# Altium PCB PCB1.PcbDoc
Units mm, origin at the board's own origin, x right, y up, seen from the top; angles counter-clockwise.
Board outline 50 x 51 mm, 2 copper layers (Top Layer, Bottom Layer); 25 components, 38 nets, 105 pads, 12 vias.
Unrouted connection lines stored in the file: 44.
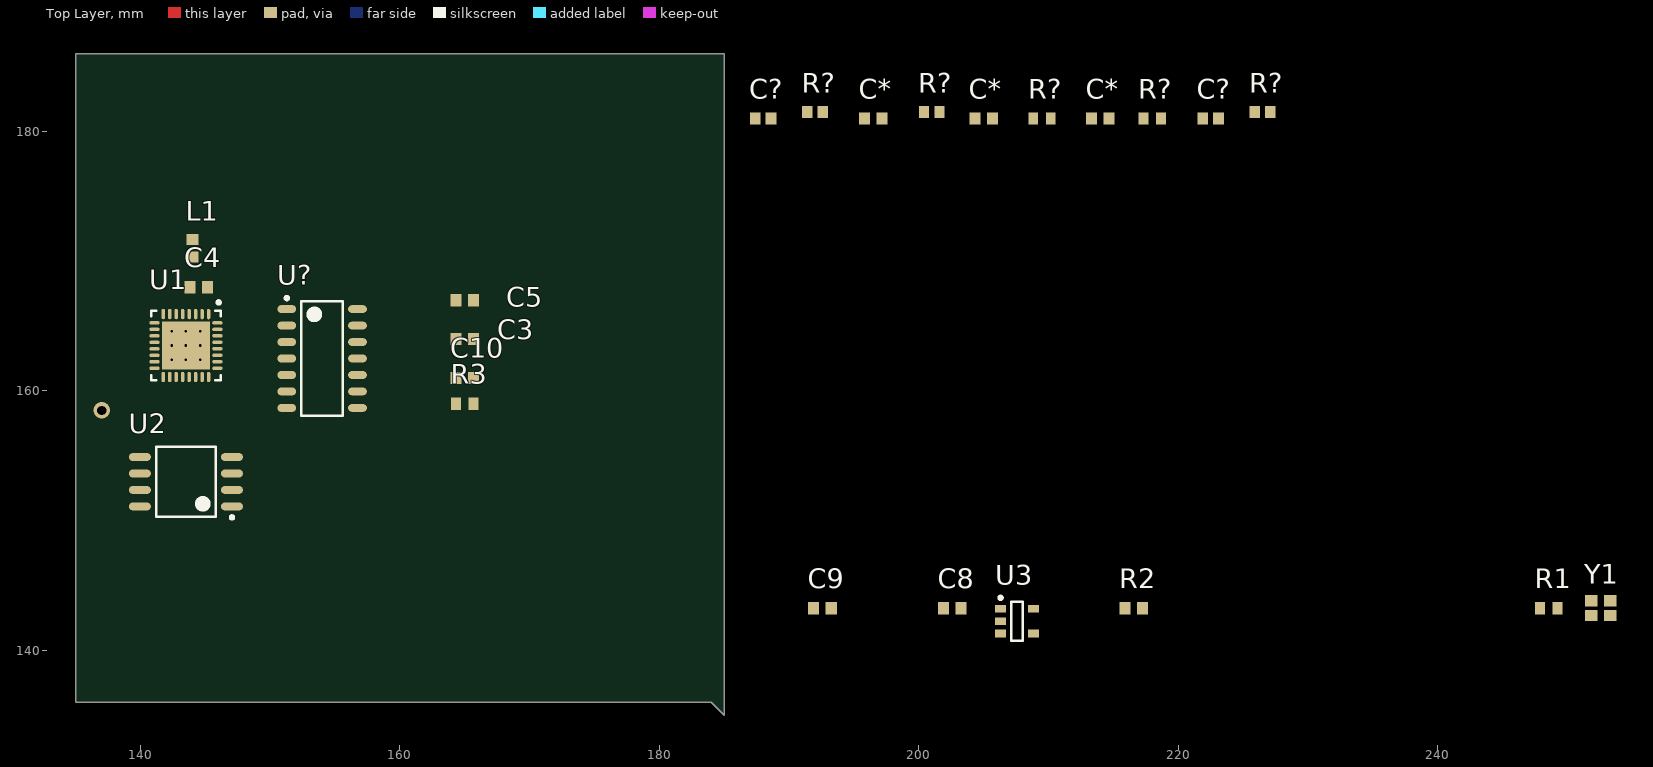
[diagram p0: Top Layer view]
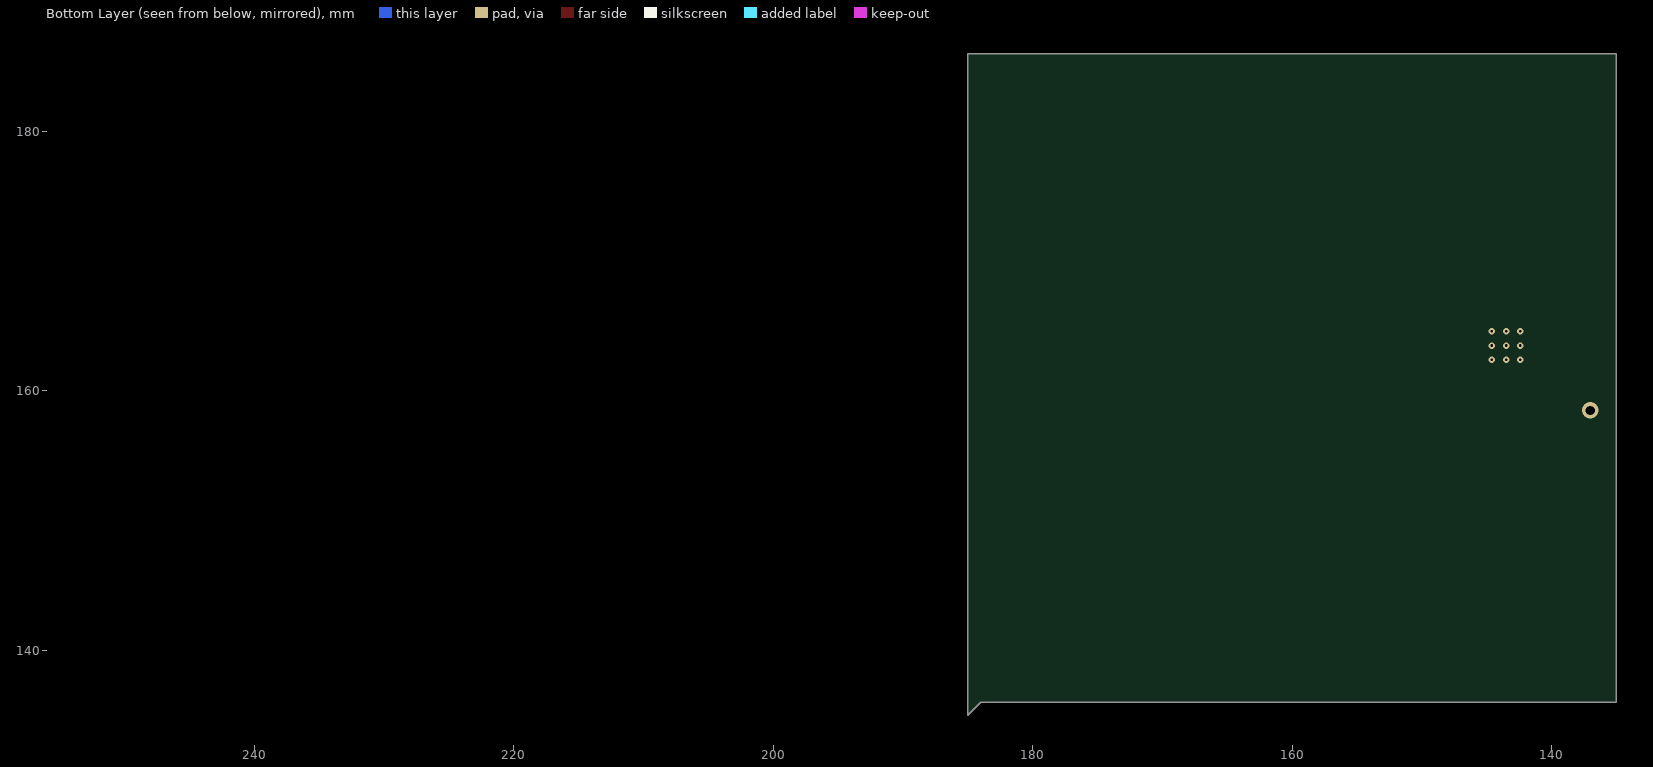
[diagram p1: Bottom Layer view, seen from below]

## Layer stack, top to bottom
Top Solder: solder mask 0.0102, Solder Resist, Dk 3.5
Top Layer: signal copper 0.0356
Dielectric 1: dielectric 0.32, FR-4, Dk 4.8
Bottom Layer: signal copper 0.0356
Bottom Solder: solder mask 0.0102, Solder Resist, Dk 3.5

## Board outline
135,136 135,186 185,186 185,135 184,136

## Design rules (kind name [scope] priority, off if disabled: settings)
Clearance [All] p1: gap=0.152 ignorepadtopadclearanceinfootprint=FALSE
PolygonConnect [All] p1: connectstyle=Relief reliefconductorwidth=0.254 reliefentries=4 polygonreliefangle="90 Angle" airgapwidth=0.254
RoomDefinition Sensor [InComponentClass('Sensor')] p1: confinementstyle=ConfineIn formatcopy=TRUE lockcomponents=FALSE outline 186.5,172 237.5,172 237.5,185 186.5,185
RoomDefinition MCU [InComponentClass('MCU')] p2: confinementstyle=ConfineIn formatcopy=TRUE lockcomponents=FALSE outline 186.575,135.25 254.575,135.25 254.575,148.25 186.575,148.25
RoutingTopology [All] p1: topology=Daisy_Simple
RoutingVias [All] p1: holewidth=0.3 width=0.635 viastyle="Through Hole" minholewidth=0.3 minwidth=0.457 maxholewidth=6.3 maxwidth=1.27
SolderMaskExpansion [All] p1: expansion=0
Width [All] p1: maxlimit=0.254 minlimit=0.152 preferedwidth=0.254
29 further rules are at their usual default settings.

## Classes and differential pairs
component class Sensor: C* C? Q? R? U?
component class MCU: C1 C2 C3 C4 C5 C6 C8 C9 C10 C? L1 R1 R2 R3 U1 U2 U3 VR1 Y1

## Components (designator, comment, footprint, x,y, rotation, side; value= is the part's Value field where it differs from the comment)
C3 "1UF" Chip2PinSM127P600-8N-SAMSUNG-0603 165,164 r0 top
C4 "10UF" Chip2PinSM127P600-8N-SAMSUNG-0603 144.5,168 r0 top
C5 "0.1UF" Chip2PinSM127P600-8N-SAMSUNG-0603 165,167 r180 top
C8 "1UF" Chip2PinSM127P600-8N-SAMSUNG-0603 202.575,143.25 r0 top
C9 "0.1UF" Chip2PinSM127P600-8N-SAMSUNG-0603 192.575,143.25 r0 top
C10 "10UF" Chip2PinSM127P600-8N-SAMSUNG-0603 165,161 r0 top
C* "0.1UF" Chip2PinSM127P600-8N-SAMSUNG-0603 196.5,181 r0 top
C* "0.1UF" Chip2PinSM127P600-8N-SAMSUNG-0603 214,181 r0 top
C* "0.1UF" Chip2PinSM127P600-8N-SAMSUNG-0603 205,181 r0 top
C? "33UF" Chip2PinSM127P600-8N-TDK_0603 222.5,181 r0 top
C? "33UF" Chip2PinSM127P600-8N-TDK_0603 188,181 r0 top
L1 "2.2NH" Chip2PinSM127P600-8N-SAMSUNG-0603 144,171 r90 top
R1 "10K" Chip2PinSM127P600-8N-vishay-0603 248.575,143.25 r0 top
R2 "200" Chip2PinSM127P600-8N-SAMSUNG-0603 216.575,143.25 r0 top
R3 "10K" Chip2PinSM127P600-8N-vishay-0603 165,159 r0 top
R? "10K" Chip2PinSM127P600-8N-vishay-0603 218,181 r0 top
R? "10K" Chip2PinSM127P600-8N-vishay-0603 209.5,181 r0 top
R? "560K" Chip2PinSM127P600-8N-Stackpole-0603 192,181.5 r0 top
R? "560K" Chip2PinSM127P600-8N-Stackpole-0603 226.5,181.5 r0 top
R? "47K" Chip2PinSM127P600-8N-0603-te 201,181.5 r0 top
U1 "ESP8266EX" QFN127P600-8N 143.5,163.5 r270 top
U2 "IC FLASH 32M" SOIC127P600-8N-208 143.5,153 r180 top
U3 "IC BATT" SOT23127P600-8N-STC4054 207.575,142.25 r0 top
U? "IC PIR DETECTOR" SOIC127P600-8N-PIRIC_NCS36000 154,162.5 r0 top
Y1 "FA-128 26.0000MF10Z-W5" PCBComponent_1 252.575,143.25 r0 top

## Footprints (in the part's own frame and the unit in brackets; to place one, negate y for a bottom-side part, rotate by r counter-clockwise, add the part's x,y. Pads: shape width x height; smd on the part's side, far side on the other; paste and mask are expansions set on the pad)
Chip2PinSM127P600-8N-0603-te [mm]
  rect 0.8x0.9 smd: 1(-0.6,0) 2(0.6,0)
  body extent -0.8,-0.45 0.8,0.45, height 0.65
Chip2PinSM127P600-8N-SAMSUNG-0603 [mm]
  rect 0.85x0.95 smd: 1(-0.675,0) 2(0.675,0)
  body extent -0.85,-0.45 0.85,0.45, height 0.9
Chip2PinSM127P600-8N-Stackpole-0603 [mm]
  rect 0.8x0.9 smd: 1(-0.6,0) 2(0.6,0)
  body extent -0.8,-0.45 0.8,0.45, height 0.5
Chip2PinSM127P600-8N-TDK_0603 [mm]
  rect 0.84x0.94 smd: 1(-0.61,0) 2(0.61,0)
  body extent -0.8,-0.45 0.8,0.45, height 0.9
Chip2PinSM127P600-8N-vishay-0603 [mm]
  rect 0.75x0.95 smd: 1(-0.675,0) 2(0.675,0)
  body extent -0.82,-0.48 0.82,0.48, height 0.5
PCBComponent_1 [mm]
  rect 0.95x0.85 smd: 1(-0.725,-0.575) 2(0.725,-0.575) 3(0.725,0.575) 4(-0.725,0.575)
  round 0.5 on Top Overlay: 5(-1.25,-1.5)
QFN127P600-8N [mm] "ESP8266"
  oval 0.8x0.25 smd: 1(-2.425,1.75) 2(-2.425,1.25) 3(-2.425,0.75) 4(-2.425,0.25) 5(-2.425,-0.25) 6(-2.425,-0.75) 7(-2.425,-1.25) 8(-2.425,-1.75) 17(2.425,-1.75) 18(2.425,-1.25) 19(2.425,-0.75) 20(2.425,-0.25) 21(2.425,0.25) 22(2.425,0.75) 23(2.425,1.25) 24(2.425,1.75)
  oval 0.25x0.8 smd: 9(-1.75,-2.425) 10(-1.25,-2.425) 11(-0.75,-2.425) 12(-0.25,-2.425) 13(0.25,-2.425) 14(0.75,-2.425) 15(1.25,-2.425) 16(1.75,-2.425) 25(1.75,2.425) 26(1.25,2.425) 27(0.75,2.425) 28(0.25,2.425) 29(-0.25,2.425) 30(-0.75,2.425) 31(-1.25,2.425) 32(-1.75,2.425)
  rect 3.7x3.7 smd: 33(0,0)
  silkscreen extent -3.45,-2.68 2.68,2.67, body extent -2.52,-2.53 2.53,2.52, height 0.9
SOIC127P600-8N-208 [mm]
  oval 1.7x0.6 smd: 1(-3.55,1.905) 2(-3.55,0.635) 3(-3.55,-0.635) 4(-3.55,-1.905) 5(3.55,-1.905) 6(3.55,-0.635) 7(3.55,0.635) 8(3.55,1.905)
  silkscreen extent -3.68,-2.7 2.3,2.88, body extent -3.95,-2.7 3.95,2.7, height 1.75
SOIC127P600-8N-PIRIC_NCS36000 [mm]
  oval 1.45x0.6 smd: 1(-2.725,3.81) 2(-2.725,2.54) 3(-2.725,1.27) 4(-2.725,0) 5(-2.725,-1.27) 6(-2.725,-2.54) 7(-2.725,-3.81) 8(2.725,-3.81) 9(2.725,-2.54) 10(2.725,-1.27) 11(2.725,0) 12(2.725,1.27) 13(2.725,2.54) 14(2.725,3.81)
  silkscreen extent -2.85,-4.4 1.6,4.78, body extent -2,-4.4 2,4.4, height 1.75
SOT23127P600-8N-STC4054 [mm]
  rect 0.85x0.6 smd: 1(-1.275,0.95) 2(-1.275,0) 3(-1.275,-0.95) 4(1.275,-0.95) 5(1.275,0.95)
  silkscreen extent -1.4,-1.5 0.45,1.92, body extent -1.3,-1.5 1.3,1.5, height 1.1

## Part data
C3 C8: library part CL10B105KP8NNNC, "CAP CER 1UF 10V X7R 0603", Manufacturer="Samsung Electro-Mechanics", Operating Temperature="-55°C ~ 125°C", Package / Case="0603 (1608 Metric)", Ratings=-, Supplier Part Number 1=1276-1946-1-ND, Temperature Coefficient=X7R, Tolerance=±10%, Voltage - Rated=10V, Applications="General Purpose", Category=Capacitors, ComponentLink1Description=http://www.samsungsem.com/kr/support/product-search/mlcc/CL10B105KP8NNNC.jsp, ComponentLink1URL=http://www.samsungsem.com/kr/support/product-search/mlcc/CL10B105KP8NNNC.jsp, Features=-, Height - Seated (Max)=-, Lead Spacing=-, Lead Style=-, Manufacturer Part Number=CL10B105KP8NNNC, Mounting Type="Surface Mount, MLCC", Notification="Current market demand for these product types have resulted in fluctuating and extending lead times. Lead times may differ.", Packaging="Cut Tape (CT)", Part Status=Active, Pricing 1="1=0.08, 10=0.044, 100=0.0197, 500=0.01408, 1000=0.01106 (EUR)", RoHS="RoHS Compliant", Size / Dimension="0.063\" L x 0.031\" W (1.60mm x 0.80mm)", Stock 1=40000, Supplier 1=Digi-Key, Thickness (Max)="0.035\" (0.90mm)"
C4 C10: library part CL10A106KQ8NNNC, "CAP CER 10UF 6.3V X5R 0603", Manufacturer="Samsung Electro-Mechanics", Operating Temperature="-55°C ~ 85°C", Package / Case="0603 (1608 Metric)", Ratings=-, Supplier Part Number 1=1276-1038-1-ND, Temperature Coefficient=X5R, Tolerance=±10%, Voltage - Rated=6.3V, Applications="General Purpose", Category=Capacitors, ComponentLink1Description=http://www.samsungsem.com/kr/support/product-search/mlcc/CL10A106KQ8NNNC.jsp, ComponentLink1URL=http://www.samsungsem.com/kr/support/product-search/mlcc/CL10A106KQ8NNNC.jsp, Features=-, Height - Seated (Max)=-, Lead Spacing=-, Lead Style=-, Manufacturer Part Number=CL10A106KQ8NNNC, Mounting Type="Surface Mount, MLCC", Notification="Current market demand for these product types have resulted in fluctuating and extending lead times. Lead times may differ.", Packaging="Cut Tape (CT)", Part Status=Active, Pricing 1="1=0.25, 10=0.177, 100=0.1001, 500=0.07064, 1000=0.0618 (EUR)", RoHS="RoHS Compliant", Size / Dimension="0.063\" L x 0.031\" W (1.60mm x 0.80mm)", Stock 1=40000, Supplier 1=Digi-Key, Thickness (Max)="0.035\" (0.90mm)"
C5 C9 C* C* C*: library part CL10F104ZO8NNNC, "CAP CER 0.1UF 16V Y5V 0603", Manufacturer="Samsung Electro-Mechanics", Operating Temperature="-30°C ~ 85°C", Package / Case="0603 (1608 Metric)", Ratings=-, Supplier Part Number 1=1276-1258-1-ND, Temperature Coefficient="Y5V (F)", Tolerance="-20%, +80%", Voltage - Rated=16V, Applications="General Purpose", Category=Capacitors, ComponentLink1Description=http://www.samsungsem.com/kr/support/product-search/mlcc/CL10F104ZO8NNNC.jsp, ComponentLink1URL=http://www.samsungsem.com/kr/support/product-search/mlcc/CL10F104ZO8NNNC.jsp, Features=-, Height - Seated (Max)=-, Lead Spacing=-, Lead Style=-, Manufacturer Part Number=CL10F104ZO8NNNC, Mounting Type="Surface Mount, MLCC", Notification="Current market demand for these product types have resulted in fluctuating and extending lead times. Lead times may differ.", Packaging="Cut Tape (CT)", Part Status=Active, Pricing 1="1=0.08, 10=0.032, 100=0.0144, 500=0.01026, 1000=0.00806 (EUR)", RoHS="RoHS Compliant", Size / Dimension="0.063\" L x 0.031\" W (1.60mm x 0.80mm)", Stock 1=40000, Supplier 1=Digi-Key, Thickness (Max)="0.035\" (0.90mm)"
C? C?: library part C2012X5R0J336M125AC, "CAP CER 33UF 6.3V X5R 0805", Manufacturer="TDK Corporation", Operating Temperature="-55°C ~ 85°C", Package / Case="0805 (2012 Metric)", Ratings=-, Supplier Part Number 1=445-5986-6-ND, Temperature Coefficient=X5R, Tolerance=±20%, Voltage - Rated=6.3V, Applications="General Purpose", Category=Capacitors, ComponentLink1Description=https://product.tdk.com/info/en/catalog/datasheets/mlcc_commercial_general_en.pdf, ComponentLink1URL=https://product.tdk.com/info/en/catalog/datasheets/mlcc_commercial_general_en.pdf, Failure Rate=-, Features="Low ESL", Height - Seated (Max)=-, Lead Spacing=-, Lead Style=-, Manufacturer Part Number=C2012X5R0J336M125AC, Mounting Type="Surface Mount, MLCC", Notification="Current market demand for these product types have resulted in fluctuating and extending lead times. Lead times may differ.", Packaging=Digi-Reel®, Part Status=Active, Pricing 1="1=0.86, 10=0.654, 100=0.4676, 500=0.362, 1000=0.31172 (EUR)", RoHS="RoHS Compliant", Size / Dimension="0.079\" L x 0.049\" W (2.00mm x 1.25mm)", Stock 1=20000, Supplier 1=Digi-Key, Thickness (Max)="0.057\" (1.45mm)"
L1: library part L-14C2N2SV4T, "FIXED IND 2.2NH 300MA 150 MOHM", Current - Saturation=-, DC Resistance (DCR)="150 mOhm Max", Frequency - Self Resonant=12GHz, Manufacturer="Johanson Technology Inc.", Operating Temperature="-40°C ~ 100°C", Package / Case="0603 (1608 Metric)", Q @ Freq="8 @ 100MHz", Supplier Part Number 1=712-1427-1-ND, Tolerance=±0.3nH, Category="Inductors, Coils, Chokes", ComponentLink1Description=https://media.digikey.com/pdf/Data%20Sheets/Johanson%20Technology/RF_Ceramic_Chip_Inductors.pdf, ComponentLink1URL=https://media.digikey.com/pdf/Data%20Sheets/Johanson%20Technology/RF_Ceramic_Chip_Inductors.pdf, Height - Seated (Max)="0.037\" (0.95mm)", Manufacturer Part Number=L-14C2N2SV4T, Material - Core=Ceramic, Mounting Type="Surface Mount", Packaging="Cut Tape (CT)", Part Status=Active, Pricing 1="1=0.08, 10=0.052, 100=0.0348, 500=0.02898, 1000=0.02434 (EUR)", Ratings=-, RoHS="RoHS Compliant", Shielding=Unshielded, Size / Dimension="0.063\" L x 0.031\" W (1.60mm x 0.80mm)", Stock 1=17153, Supplier 1=Digi-Key, Supplier Device Package="0603 (1608 Metric)", Type=Multilayer
R1 R3 R? R?: library part MCT06030C1002FP500, "RES SMD 10K OHM 1% 1/8W 0603", Manufacturer="Vishay Beyschlag", Operating Temperature="-55°C ~ 155°C", Package / Case="0603 (1608 Metric)", Power (Watts)="0.125W, 1/8W", Supplier Device Package=0603, Supplier Part Number 1=MCT0603-10.0K-CFCT-ND, Temperature Coefficient=±50ppm/°C, Tolerance=±1%, Category=Resistors, ComponentLink1Description=http://www.vishay.com/docs/28705/mcx0x0xpro.pdf, ComponentLink1URL=http://www.vishay.com/docs/28705/mcx0x0xpro.pdf, Composition="Thin Film", Failure Rate=-, Features=Anti-Sulfur, Height - Seated (Max)="0.022\" (0.55mm)", Manufacturer Part Number=MCT06030C1002FP500, Packaging="Cut Tape (CT)", Part Status=Active, Pricing 1="1=0.16, 10=0.133, 100=0.0521, 1000=0.02182, 2500=0.02 (EUR)", RoHS="RoHS Compliant", Size / Dimension="0.061\" L x 0.033\" W (1.55mm x 0.85mm)", Stock 1=1201929, Supplier 1=Digi-Key
R2: library part RC1608F201CS, "RES SMD 200 OHM 1% 1/10W 0603", Manufacturer="Samsung Electro-Mechanics", Operating Temperature="-55°C ~ 155°C", Package / Case="0603 (1608 Metric)", Power (Watts)="0.1W, 1/10W", Supplier Device Package=0603, Supplier Part Number 1=1276-4584-1-ND, Temperature Coefficient=±100ppm/°C, Tolerance=±1%, Category=Resistors, ComponentLink1Description=http://www.samsungsem.com/kr/support/product-search/chip-resistor/RC1608F201CS.jsp, ComponentLink1URL=http://www.samsungsem.com/kr/support/product-search/chip-resistor/RC1608F201CS.jsp, Composition="Thick Film", Failure Rate=-, Features="Moisture Resistant", Height - Seated (Max)="0.022\" (0.55mm)", Manufacturer Part Number=RC1608F201CS, Packaging="Cut Tape (CT)", Part Status=Active, Pricing 1="1=0.08, 10=0.028, 100=0.0115, 1000=0.00516, 2500=0.00448 (EUR)", RoHS="RoHS Compliant", Size / Dimension="0.063\" L x 0.032\" W (1.60mm x 0.80mm)", Stock 1=235074, Supplier 1=Digi-Key
R? R?: library part ERJ-3EKF5603V, "RES SMD 560K OHM 1% 1/10W 0603", Manufacturer="Panasonic Electronic Components", Operating Temperature="-55°C ~ 155°C", Package / Case="0603 (1608 Metric)", Power (Watts)="0.1W, 1/10W", Supplier Device Package=0603, Supplier Part Number 1=P560KHCT-ND, Temperature Coefficient=±100ppm/°C, Tolerance=±1%, Category=Resistors, ComponentLink1Description=https://industrial.panasonic.com/cdbs/www-data/pdf/RDA0000/AOA0000C304.pdf, ComponentLink1URL=https://industrial.panasonic.com/cdbs/www-data/pdf/RDA0000/AOA0000C304.pdf, Composition="Thick Film", Failure Rate=-, Features="Automotive AEC-Q200", Height - Seated (Max)="0.022\" (0.55mm)", Manufacturer Part Number=ERJ-3EKF5603V, Packaging="Cut Tape (CT)", Part Status=Active, Pricing 1="1=0.09, 10=0.057, 100=0.0231, 1000=0.01037, 2500=0.009 (EUR)", RoHS="RoHS Compliant", Size / Dimension="0.063\" L x 0.032\" W (1.60mm x 0.80mm)", Stock 1=221508, Supplier 1=Digi-Key
R?: library part CRGCQ0603F47K, "CRGCQ 0603 47K 1%", Manufacturer="TE Connectivity Passive Product", Operating Temperature="-55°C ~ 155°C", Package / Case="0603 (1608 Metric)", Power (Watts)="0.1W, 1/10W", Supplier Device Package=0603, Supplier Part Number 1=A129708CT-ND, Temperature Coefficient=±100ppm/°C, Tolerance=±1%, Category=Resistors, ComponentLink1Description=https://www.te.com/commerce/DocumentDelivery/DDEController?Action=srchrtrv&DocNm=1773204-3&DocType=DS&DocLang=English, ComponentLink1URL=https://www.te.com/commerce/DocumentDelivery/DDEController?Action=srchrtrv&DocNm=1773204-3&DocType=DS&DocLang=English, Composition="Thick Film", Failure Rate=-, Features="Automotive AEC-Q200, Moisture Resistant", Height - Seated (Max)="0.022\" (0.55mm)", Manufacturer Part Number=CRGCQ0603F47K, Packaging="Cut Tape (CT)", Part Status=Active, Pricing 1="1=0.09, 10=0.026, 100=0.0106, 1000=0.00474, 2500=0.00411 (EUR)", RoHS="RoHS Compliant", Size / Dimension="0.063\" L x 0.031\" W (1.60mm x 0.80mm)", Stock 1=50, Supplier 1=Digi-Key
U1: "SMD IC ESP8266EX, QFN32-PIN, 5_5", Current - Receiving="50mA ~ 56mA", Current - Transmitting="120mA ~ 170mA", Frequency=2.4GHz, Manufacturer="Espressif Systems", Package / Case="32-VFQFN Exposed Pad", Power - Output=20dBm, Supplier Part Number 1=1904-1001-1-ND, Voltage - Supply="2.5 V ~ 3.6 V", Category="RF/IF and RFID", ComponentLink1Description=https://espressif.com/sites/default/files/documentation/0a-esp8266ex_datasheet_en.pdf, ComponentLink1URL=https://espressif.com/sites/default/files/documentation/0a-esp8266ex_datasheet_en.pdf, Data Rate (Max)=54Mbps, Manufacturer Part Number=ESP8266EX, Memory Size=-, Modulation=-, Packaging="Cut Tape (CT)", Part Status=Active, Pricing 1="1=2.49, 10=2.222, 25=2, 100=1.8223, 250=1.64452, 500=1.47562 (EUR)", Protocol=802.11b/g/n, RF Family/Standard=WiFi, RoHS="RoHS Compliant", Sensitivity=-91dBm, Serial Interfaces="I²C, I²S, SPI, UART", Stock 1=2122, Supplier 1=Digi-Key, Type="TxRx + MCU"
U2: library part "W25Q32JVSSIQ TR", "IC FLASH 32M SPI 133MHZ 8SOIC", Manufacturer="Winbond Electronics", Operating Temperature="-40°C ~ 85°C (TA)", Package / Case="8-SOIC (0.209\", 5.30mm Width)", Supplier Device Package=8-SOIC, Supplier Part Number 1=W25Q32JVSSIQCT-ND, Voltage - Supply="2.7 V ~ 3.6 V", Category="Integrated Circuits (ICs)", ComponentLink1Description=http://www.winbond.com/resource-files/w25q32jv%20revg%2003272018%20plus.pdf, ComponentLink1URL=http://www.winbond.com/resource-files/w25q32jv%20revg%2003272018%20plus.pdf, Manufacturer Part Number="W25Q32JVSSIQ TR", Memory Format=FLASH, Memory Interface="SPI - Quad I/O", Memory Size="32Mb (4M x 8)", Memory Type=Non-Volatile, Mounting Type="Surface Mount", Packaging="Cut Tape (CT)", Part Status=Active, Pricing 1="1=0.83, 10=0.753, 25=0.7428, 50=0.739, 100=0.6606, 250=0.65488, 500=0.64536, 750=0.63545, 1000=0.62208 (EUR)", RoHS="RoHS Compliant", Stock 1=102739, Supplier 1=Digi-Key, Technology="FLASH - NOR", Write Cycle Time - Word, Page=3ms
U3: library part STC4054GR, "IC BATT CHRGR 800MA TSOT23-5", Base Part Number=STC4054, Battery Pack Voltage=4.2V, Charge Current - Max=800mA, Current - Charging="Constant - Programmable", Manufacturer=STMicroelectronics, Operating Temperature="-40°C ~ 85°C (TA)", Package / Case="SOT-23-5 Thin, TSOT-23-5", Supplier Device Package=TSOT-23-5, Supplier Part Number 1=497-5809-6-ND, Voltage - Supply (Max)=6.5V, Battery Chemistry=Lithium-Ion, Category="Integrated Circuits (ICs)", ComponentLink1Description=http://www.st.com/content/ccc/resource/technical/document/datasheet/df/b9/e6/5b/ec/92/45/ed/CD00132951.pdf/files/CD00132951.pdf/jcr:content/translations/en.CD00132951.pdf, ComponentLink1URL=http://www.st.com/content/ccc/resource/technical/document/datasheet/df/b9/e6/5b/ec/92/45/ed/CD00132951.pdf/files/CD00132951.pdf/jcr:content/translations/en.CD00132951.pdf, Fault Protection=-, Interface=-, Manufacturer Part Number=STC4054GR, Number of Cells=1, Packaging=Digi-Reel®, Part Status=Active, Pricing 1="1=1.35, 10=1.208, 100=0.9707, 500=0.7975, 1000=0.66079 (EUR)", Programmable Features=Current, RoHS="RoHS Compliant", Stock 1=11621, Supplier 1=Digi-Key
U?: library part NCS36000DG, "IC PIR DETECTOR CTLR 14SOIC", Base Part Number=NCS36000, Manufacturer="ON Semiconductor", Operating Temperature="-40°C ~ 85°C", Package / Case="14-SOIC (0.154\", 3.90mm Width)", Supplier Device Package=14-SOIC, Supplier Part Number 1=NCS36000DGOS-ND, Category="Integrated Circuits (ICs)", ComponentLink1Description=http://www.onsemi.com/pub/Collateral/NCS36000-D.PDF, ComponentLink1URL=http://www.onsemi.com/pub/Collateral/NCS36000-D.PDF, Input Type=Digital, Interface=CMOS, Manufacturer Part Number=NCS36000DG, Mounting Type="Surface Mount", Output Type=Digital, Packaging=Tray, Part Status=Active, Pricing 1="1=0.75, 55=0.63655, 110=0.52291, 550=0.43195, 1045=0.34101 (EUR)", RoHS="RoHS Compliant", Stock 1=566, Supplier 1=Digi-Key, Type="Detector Controller"
Y1: "CRYSTAL 26.0000MHZ 12PF SMD", Frequency Stability=±10ppm, Load Capacitance=12pF, Manufacturer=EPSON, Operating Mode=Fundamental, Operating Temperature="-20°C ~ 75°C", Package / Case="4-SMD, No Lead", Ratings=-, Supplier Part Number 1=SER4186CT-ND, Category="Crystals, Oscillators, Resonators", ComponentLink1Description=https://support.epson.biz/td/api/doc_check.php?dl=brief_FA-128&lang=en, ComponentLink1URL=https://support.epson.biz/td/api/doc_check.php?dl=brief_FA-128&lang=en, Frequency Tolerance=±10ppm, Height - Seated (Max)="0.020\" (0.50mm)", Manufacturer Part Number="FA-128 26.0000MF10Z-W5", Mounting Type="Surface Mount", Packaging="Cut Tape (CT)", Part Status=Active, Pricing 1="1=0.5, 10=0.419, 50=0.3772, 100=0.3353, 500=0.3185, 1000=0.2682 (EUR)", RoHS="RoHS Compliant", Size / Dimension="0.079\" L x 0.063\" W (2.00mm x 1.60mm)", Stock 1=200409, Supplier 1=Digi-Key, Type="MHz Crystal"

## Via types
v1: diameter 0.5, hole 0.2, Top Layer to Bottom Layer, 9 vias
v2: diameter 1.27, hole 0.711, Top Layer to Bottom Layer, 3 vias

## Nets (pads, with @x,y where several pads share a name; then routed paths per layer and width w, separated by ;. In a path a pad name is that pad's centre, name@x,y a point inside that pad or via, vN(x,y) a via of type N, cw(c..) or ccw(c..) an arc to the next point about the centre after c; other vN are vias at no path point)
3v3: C3.1 C4.1 C5.2 C10.1 U1.1 U1.3 U1.4 U1.11 U1.17 U1.29 U1.30 U?.14
ANT: L1.1
CH_PU: U1.7
GND: C3.2 C4.2 C5.1 C8.2 C9.2 C10.2 C*.1@204.325,181 R1.2 R3.2 R?.1@200.4,181.5 U2.4 U3.2 Y1.2 Y1.4
GPIO0: U1.15
GPIO4: U1.16
GPIO5: U1.24
GPIO12: U1.10
GPIO13: U1.12
GPIO15: U1.13
GPIO16: U1.8
I2C_SCL: U1.9
I2C_SDA: U1.14
LNA: C?.1@221.89,181 L1.2 U1.2
NetC*_2: C*.2@205.675,181 R?.2@201.6,181.5 U?.7
NetC?_2: C?.2@223.11,181 R?.1@217.325,181
NetQ?_1: U?.6
NetR1_1: R1.1 U1.31
NetR2_1: R2.1 U1.21
NetR3_1: R3.1 U3.5
NetR?_1: R?.1@225.9,181.5 R?.2@218.675,181 U?.2
NetR?_2: R?.2@227.1,181.5 U?.1
RST: U1.32
SCK/CLK: R2.2 U2.6
SCS/CMD: U1.20 U2.1
SDI/SD1: U1.23 U2.5
SDO/SD0: U1.22 U2.2
SHD/SD3: U1.18 U2.7
SWP/SD3: U1.19
SWP/SD4: U2.3
TOUT: U1.6
URXD: U1.25
UTXD: U1.26
VBAT: C9.1 U3.3
VCC: U2.8
VIN: C8.1 U3.4
XTAL_IN: U1.28 Y1.1
XTAL_OUT: U1.27 Y1.3
pads on no net: C*.1@195.825,181 C*.1@213.325,181 C*.2@197.175,181 C*.2@214.675,181 C?.1@187.39,181 C?.2@188.61,181 R?.1@191.4,181.5 R?.1@208.825,181 R?.2@192.6,181.5 R?.2@210.175,181 U1.5 U1.33 U3.1 U?.3 U?.4 U?.5 U?.8 U?.9 U?.10 U?.11 U?.12 U?.13 Y1.5
copper on no net:
  other v1: 142.4,162.4 143.5,162.4 144.6,162.4 142.4,163.5 143.5,163.5 144.6,163.5 142.4,164.6 143.5,164.6 144.6,164.6
  other v2: 137,158.5 137,158.5 137,158.5